# EAGLE board PWR1 (EAGLE 4.16)
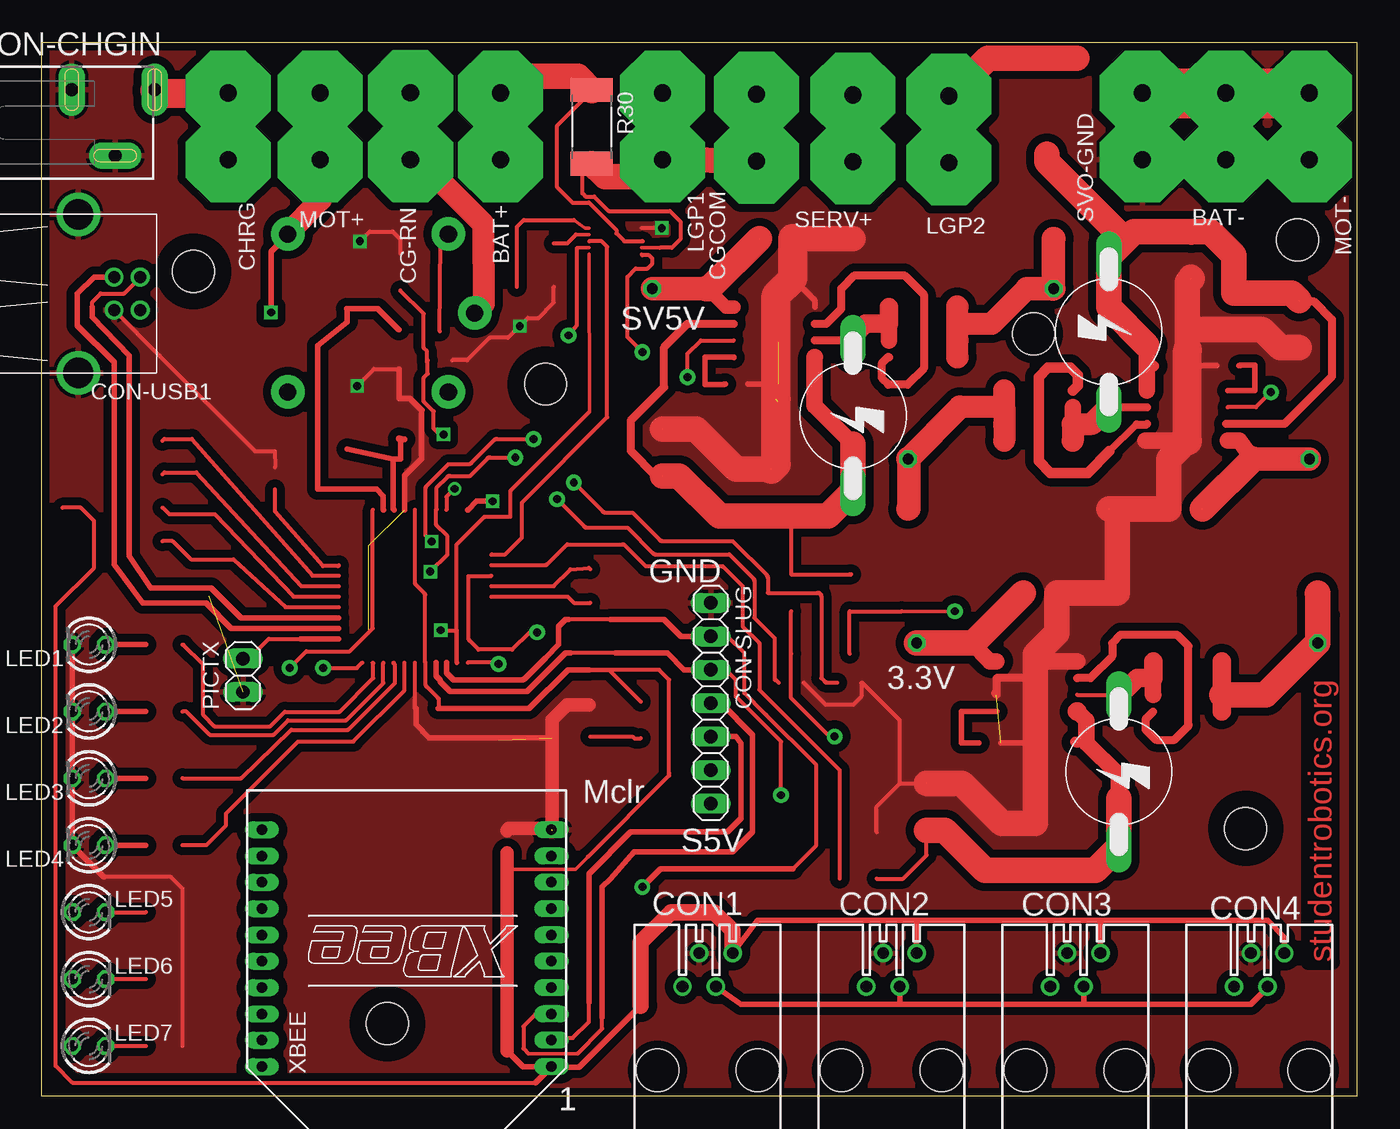
[diagram p0: board, top side]
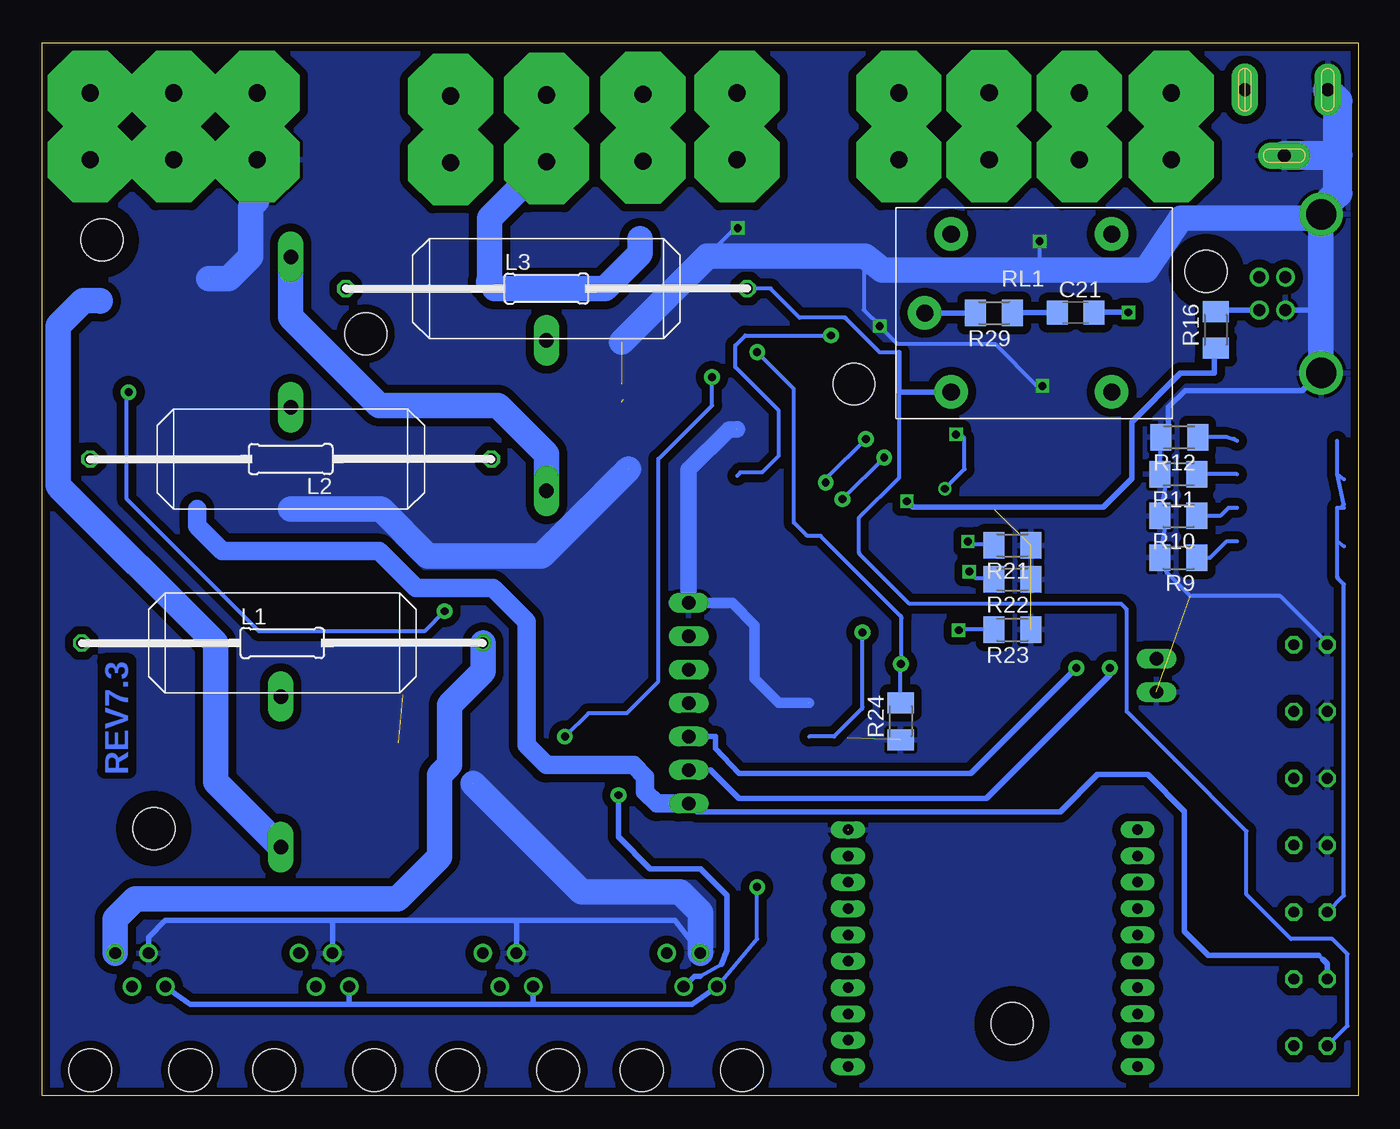
[diagram p1: board, bottom side, seen from below]

Size 100 x 80 mm. Coordinates in mm from the lower left corner, seen from the top.
Outline: 0,0 100,0 100,80 0,80 0,0
Copper layers (1*16): Top 0.035mm / dielectric 1.5mm / Bottom 0.035mm
Design rules "default": minimum track width 0.2mm, minimum drill 0.5mm, track to track 0.2mm, track to pad 0.2mm, pad to pad 0.2mm, via to via 0.2mm, smd to smd 0mil, copper to edge 0.2mm, drill to drill 0.3mm, minimum pad ring 10mil, minimum via ring 8mil, stop-mask expansion 4mil, vias tented up to drill 0mil, thermal gap 10mil
Holes 3.2 mm at 91.52,20.32 26.32,5.51 38.33,54.08 75.42,57.89 95.47,65.03 11.57,62.63
tRestrict: area 36.4,52.1 to 40.3,56; area 89.6,18.4 to 93.5,22.3; area 93.6,63.1 to 97.4,66.9; area 24.4,3.5 to 28.3,7.4; area 9.6,60.7 to 13.5,64.6
bRestrict: area 36.4,52.1 to 40.3,56; area 93.6,63.1 to 97.4,66.9; area 24.4,3.5 to 28.2,7.4; area 89.6,18.4 to 93.5,22.3; area 9.6,60.7 to 13.5,64.6

## Footprints (pad centres in the part's own frame; a part is rotated, then mirrored left to right if it is on the bottom)
SPADE = drill 1.3 pad 6.452 octagon: P$1 -5.08,-3.175; P$2 0,-3.175
C1206 = smd 1.6 x 1.8: 1 -1.4,0; 2 1.4,0
RJ11-4P4C = drill 0.889 round: 1 1.905,8.89; 2 0.635,6.35; 3 -0.635,8.89; 4 -1.905,6.35 | hole 3.251: -3.81,0; 3.81,0
SCD-014-A = drill 1 pad 2 long: 1 -2.5,13.8; 2 -2.5,7.5; 3 2.5,10.8
1X07 = drill 1.016 long: 1 -7.62,0; 2 -5.08,0; 3 -2.54,0; 4 0,0; 5 2.54,0; 6 5.08,0; 7 7.62,0
USB-B-H = drill 0.914 round: D+ 0,1.25; D- 1.981,1.25; GND 0,-1.25; VBUS 1.981,-1.25 | drill 2.286 round: GND@1 -2.718,6.02; GND@2 -2.718,-6.02
30MMRES = drill 0.813 octagon: 1 -15.24,0; 2 15.24,0
LED3MM = drill 0.813 octagon: A -1.27,0; K 1.27,0
1X02 = drill 1.016 long: 1 -1.27,0; 2 1.27,0
M1206 = smd 1.6 x 2: 1 -1.4,0; 2 1.4,0
PWR-RES = drill 1.1 pad 1.93 long: P$1 -5.715,0; P$2 5.715,0
R2512 = smd 1.8 x 3.2: 1 -2.8,0; 2 2.8,0
RELAY5PIN = drill 1.3 pad 2.54 round: C -2,0; COIL1 0,6; COIL2 0,-6; NC 12.2,-6; NO 12.2,6
XBEE = drill 0.8 pad 1.27 long: 1 -11,9; 2 -11,7; 3 -11,5; 4 -11,3; 5 -11,1; 6 -11,-1; 7 -11,-3; 8 -11,-5; 9 -11,-7; 10 -11,-9; 11 11,-9; 12 11,-7; 13 11,-5; 14 11,-3; 15 11,-1; 16 11,1; 17 11,3; 18 11,5; 19 11,7; 20 11,9

## Placement (x,y rotation side)
BAT+  6.3X0.8-SPADE  [SPADE]  31.74,76.19 90 top
BAT-  6.3X0.8-SPADE  [SPADE]  86.83,76.19 90 top
C21  [C1206]  21.49,59.51 0 bottom
CG-RN  6.3X0.8-SPADE  [SPADE]  24.88,76.2 90 top
CGCOM  6.3X0.8-SPADE  [SPADE]  51.17,76.09 90 top
CHRG  6.3X0.8-SPADE  [SPADE]  11.04,76.19 90 top
CON1  MODULE_CON  [RJ11-4P4C]  50.63,1.96 0 top
CON2  MODULE_CON  [RJ11-4P4C]  64.61,1.96 0 top
CON3  MODULE_CON  [RJ11-4P4C]  78.58,1.96 0 top
CON4  MODULE_CON  [RJ11-4P4C]  92.55,1.96 0 top
CON-CHGIN  charger in  [SCD-014-A]  -5.16,73.94 270 top
CON-SLUG  [1X07]  50.89,29.84 270 top
CON-USB1  USB-B-H  [USB-B-H]  5.55,60.96 0 top
L1  L-30MM  [30MMRES]  81.75,34.41 0 bottom
L2  L-30MM  [30MMRES]  81.11,48.38 180 bottom
L3  L-30MM  [30MMRES]  61.68,61.34 0 bottom
LED1  [LED3MM]  3.64,34.29 180 top
LED2  [LED3MM]  3.64,29.2 180 top
LED3  [LED3MM]  3.64,24.12 180 top
LED4  [LED3MM]  3.64,19.04 180 top
LED5  [LED3MM]  3.64,13.97 0 top
LED6  [LED3MM]  3.64,8.89 0 top
LED7  [LED3MM]  3.64,3.8 0 top
LGP1  4.8X0.8-SPADE  [SPADE]  44.04,76.19 90 top
LGP2  4.8X0.8-SPADE  [SPADE]  65.8,75.97 90 top
MOT+  6.3X0.8-SPADE  [SPADE]  18.02,76.19 90 top
MOT-  6.3X0.8-SPADE  [SPADE]  93.18,76.19 90 top
PICTX  [1X02]  15.35,31.96 90 top
R9  220k  [M1206]  13.68,40.89 180 bottom
R10  220k  [M1206]  13.68,44.06 180 bottom
R11  220k  [M1206]  13.68,47.24 180 bottom
R12  220k  [M1206]  13.62,50.04 180 bottom
R16  4.7k  [M1206]  10.85,58.2 90 bottom
R21  220k  [M1206]  26.29,41.83 180 bottom
R22  220k  [M1206]  26.29,39.25 180 bottom
R23  220k  [M1206]  26.29,35.42 180 bottom
R24  220k  [M1206]  34.78,28.46 90 bottom
R25  RSENSE  [PWR-RES]  81.88,24.63 270 top
R26  RSENSE  [PWR-RES]  81.11,58.03 90 top
R27  RSENSE  [PWR-RES]  61.68,51.68 270 top
R29  [M1206]  27.69,59.48 180 bottom
R30  0.04R  [R2512]  41.83,73.63 270 top
RL1  SRM-1C-SL-5VDCRELAY  [RELAY5PIN]  30.94,59.48 0 bottom
SERV+  4.8X0.8-SPADE  [SPADE]  58.51,76.05 90 top
SVO-GND  4.8X0.8-SPADE  [SPADE]  80.48,76.19 90 top
XBEE  XBEE  [XBEE]  27.78,11.23 180 top

## Library data of the parts
BAT+ BAT- CG-RN CGCOM CHRG L1-L3 LGP1 LGP2 MOT+ MOT- R25-R27 RL1 SERV+ SVO-GND XBEE = ecssr-Pwr
C21 R9-R12 R16 R21-R24 R29 R30 = rcl
CON1-CON4 = ecssr
CON-CHGIN = con-shiua-chyuan
CON-SLUG PICTX = pinhead
CON-USB1 = con-usb-2
LED1-LED7 = led

## Nets
5VSERVO: L3.2 LED7.A RL1.COIL2 SERV+.P$1
GND: BAT-.P$2 CON1.3 CON2.3 CON3.3 CON4.3 CON-CHGIN.2 CON-CHGIN.3 CON-SLUG.1 CON-USB1.GND CON-USB1.GND@1 CON-USB1.GND@2 LED1.K LED2.K LED3.K LED4.K MOT-.P$2 PICTX.1 R9.2 R10.2 R11.2 R12.2 R21.1 R22.1 R23.1 R24.1 SVO-GND.P$1 XBEE.10
L2: L3.1
N$1: LED1.A
N$2: CGCOM.P$2 LGP1.P$1 R30.2
N$3: RL1.COIL1
N$4: LED2.A
N$5: R25.P$1
N$7: C21.1 R29.1
N$11: R27.P$1
N$13: R26.P$1
N$14: LGP2.P$1
N$16: LED3.A
N$17: C21.2 MOT+.P$2 RL1.NO
N$21: LED4.A
N$22: L1.1
N$23: L2.1
N$25: R9.1
N$26: R10.1
N$27: R11.1
N$28: R12.1
N$30: LED5.K
N$31: LED6.K
N$37: LED7.K
N$38: R22.2
N$39: BAT+.P$2 R30.1
N$43: R21.2
N$49: CON-USB1.VBUS R16.2
N$51: CON-USB1.D-
N$52: CON-USB1.D+
N$54: CHRG.P$2 CON-CHGIN.1
N$61: R24.2
N$62: R23.2
N$63: R16.1
PICTXS: PICTX.2
RX2PIC: CON-SLUG.5 XBEE.2
SCL: CON1.4 CON2.4 CON3.4 CON4.4 CON-SLUG.2
SDA: CON1.2 CON2.2 CON3.2 CON4.2 CON-SLUG.3
SLUG-BOOT: CON-SLUG.6
TX2SLUG: CON-SLUG.4 XBEE.3
VLOGICRAW: R25.P$2 R26.P$2 R27.P$2
VRAW: CG-RN.P$2 R29.2 RL1.C
VREG3.3: CON1.1 CON2.1 CON3.1 CON4.1 L1.2 LED5.A XBEE.1
VREGSLUG5: CON-SLUG.7 L2.2 LED6.A

## Tracks (layer width: path | path; a pad name or v marks a point on that pad's centre or on a via)
5VSERVO  (1 unrouted)
  Top 1.016: 50.51,61.34 50.51,61.46 52.03,59.94 52.64,59.94
  Top 1.778: 50.37,61.34 50.51,61.34 | L3.2 50.37,61.34 | 50.37,61.34 50.37,61.33
  Top 1.93: 50.51,61.34 50.76,61.34 54.57,65.15
  Bottom 0.3: 1.99,11.93 5.14,11.93 8.51,15.3 8.51,20.1 13.93,25.52
  Bottom 0.305: 39.02,59.13 38.96,59.13 | 39.02,59.13 42.45,59.12 44.67,61.34 46.42,61.34 | LED7.A 0.85,5.33 0.85,10.79 1.99,11.93 | 13.93,25.52 17.61,29.2 17.61,33.02 17.61,33.01 17.61,36.87 arc-45 17.68,37.04 18.02,37.38 34.11,37.38 37.86,41.13 arc45 37.94,41.31 37.94,43.94 34.89,46.98 34.89,53.5 34.92,53.53 34.91,53.54 | 39.02,59.13 39.02,59.14 36.36,56.48 34.91,56.48 | 46.42,61.34 L3.2 | 46.42,61.34 46.42,61.38
  Bottom 0.406: 34.91,56.48 34.91,53.54 34.89,53.48 RL1.COIL2
  Bottom 1.778: 61.73,70.96 SERV+.P$1 | 65.57,61.34 65.57,61.38 66.07,61.88
  Bottom 1.93: 54.57,65.15 54.57,64 57.24,61.34 65.57,61.34 65.62,61.34 | 66.07,61.88 66.02,61.93 66.02,66.68 61.73,70.96
ADCI
  Top 0.3: 42.59,64.94 41.65,64.94
  Top 0.305: 42.59,64.94 43.02,64.51 43.02,51.56 36.54,45.08 36.54,42.41 35.27,41.14 34.25,41.14 34.24,41.13 34.21,41.13
ADCV
  Top 0.305: 60.66,16.5 60.66,16.63 60.67,16.63 60.66,16.63 60.66,20.06 60.66,20.18 arc-45 60.67,20.19 60.67,24.76 54.57,30.86 54.57,34.41 53.3,35.68 53.3,38.73 51.85,40.18 arc45 51.67,40.25 45.94,40.25 44.36,41.83 arc45 44.18,41.91 39.97,41.91 38.47,40.4 arc-45 38.29,40.33 34.21,40.33
GND  (via drill 0.6)  (16 unrouted)
  Top 0.305: 4.79,16.63 9.87,16.63 10.76,15.74 10.76,13.97 10.76,13.96 10.76,8.89 | 10.76,8.89 | 10.76,3.8 10.76,3.81 10.76,8.89 | 17.78,47.77 17.77,48.99 16.27,48.99 8.98,56.26 5.55,59.69 CON-USB1.GND | 63.46,20.06 63.46,21.97 65.24,23.74 | 67.27,23.74 67.27,23.87 67.14,23.74 65.24,23.74 | 57.94,31.41 59.63,29.71 61.68,29.71 62.32,30.35 62.32,31.36 62.34,31.36 62.38,31.41 65.24,28.55 65.24,23.74 | 41.62,29.71 41.74,29.84 | 28.48,29.44 28.45,29.44 arc-45 28.43,29.45 arc-45 28.41,29.5 28.41,32.93 | 45.62,65.94 45.72,65.94 45.73,65.93 45.74,65.94 v47.16,65.94 | 38.95,61.46 38.95,60.27 37.79,59.11 36.99,59.11 v36.37,58.49 v36.37,58.5 | 27.2,55.23 25.3,55.23 v24.01,53.94 | 31.24,55.9 32.38,55.9 34.08,57.6 35.47,57.6 v36.37,58.5 | v36.37,58.5 36.39,58.52 | 27.29,64 27.29,65.11 26.72,65.68 24.97,65.68 v24.22,64.93
  Top 0.406: 58.79,59.94 58.79,60.42 57.11,62.1 | 38.7,20.31 XBEE.10 | LED4.K | LED4.K LED3.K | 4.79,16.63 4.78,16.63 LED4.K | LED3.K 2.38,24.14 2.38,24.15 | LED3.K LED2.K | LED2.K 2.38,29.24 2.38,29.25 | 2.38,34.34 LED1.K | LED2.K 2.38,34.34 | 2.38,34.34 2.38,34.32 2.4,34.32 2.4,34.33 | 28.48,29.44 28.48,28.21 29.5,27.19 38.82,27.19 | 53.7,54.07 55.97,54.07 55.97,52.7 | 87.08,55.51 87.11,55.51 87.11,55.5 89.31,55.5 | 72.93,26.83 76.16,26.83 76.16,25.77 | 2.4,34.33 2.4,34.4 2.38,34.4 2.38,34.39 2.4,34.39 2.4,34.33 | 2.4,34.33 2.33,34.33 2.33,34.28 | 27.2,55.23 27.2,53.01 27.22,52.99 27.2,52.97 28.03,52.97 28.91,52.09 28.93,52.09 | 27.61,44.53 27.61,47.12 28.91,48.42 28.91,52.07 28.93,52.09 | 28.93,52.09 28.94,52.1
  Top 0.61: 72.58,30.47 72.58,30.5 72.48,30.6 72.58,30.7 72.58,31.74 75.53,31.74
  Top 1.016: 41.62,29.71 39.97,29.71 38.82,28.57 38.82,27.19 38.82,20.19 38.81,20.17 | 35.39,20.15 35.39,20.19 35.52,20.31 38.7,20.31
  Top 1.27: 83.91,49.78 84.01,49.78 87.08,49.78 | 55.84,52.95 55.71,52.95 | 75.53,33.02 78.73,33.02
  Top 1.93: 87.08,49.78 85.69,48.38 85.69,44.57 81.75,44.57 | 81.75,44.57 81.11,44.57 | 87.47,62.1 87.34,62.23 87.34,62.1 87.08,61.84 87.08,58.23 | 87.08,56.64 87.08,58.23 | 57.11,65.15 61.68,65.15 | 47.21,50.67 49.75,50.67 52.79,47.62 55.46,47.62 | 67.27,23.74 69.94,23.74 72.99,20.7 75.53,20.7 75.53,31.74 75.53,33.02 75.53,33.52 77.18,35.17 77.18,38.22 81.75,38.22 81.75,44.57 | 95.59,56.85 94.15,56.85 92.77,58.23 87.08,58.23
  Top 2.184: 87.08,49.78 87.08,55.51 87.08,56.64 | 57.11,65.15 57.11,62.1 55.84,60.83 55.84,52.95 55.84,48 55.46,47.62
  Top 3.81: MOT-.P$2 BAT-.P$2 83.66,76.19 SVO-GND.P$1
  Bottom 0.305: 14.57,50.29 14.57,50.28 R12.2 R11.2 14.57,46.98 14.44,46.86 14.57,46.73 R10.2 14.57,43.81 R9.2 14.57,39.75 12.79,37.97 5.93,37.97 2.38,34.41 | 49.49,63.8 47.35,65.94 v47.16,65.94 | 37.6,63.8 37.6,63.7 37.57,63.67 37.57,59.71 36.37,58.51 v36.37,58.49 36.37,58.46 35.05,57.14 27.63,57.14 24.43,53.94 v24.01,53.94 | 24.22,62.74 v24.22,64.93
  Bottom 0.406: CON4.3 91.91,12.06 90.64,13.33 77.94,13.33 | 63.97,13.33 51.91,13.33 CON1.3 | 63.97,13.33 77.94,13.33 | 63.97,13.33 CON2.3 | 77.94,13.33 CON3.3 | 2.88,54.99 4.28,53.59 13.17,53.59 14.44,52.32 14.44,50.29 R12.2 | CON-USB1.GND 5.53,59.69 2.88,59.69 | LED1.K 2.38,34.33 2.38,34.34 2.38,34.41
  Bottom 0.813: 41.74,29.84 44.01,29.84 45.87,31.7 45.87,35.76 47.57,37.46 50.84,37.46 50.87,37.43 CON-SLUG.1
  Bottom 1.27: CON-SLUG.1 50.89,47.58 47.83,50.64 47.22,50.64 47.21,50.65 47.21,50.67
  Bottom 1.93: CON-USB1.GND@2 2.88,54.99 2.88,59.69 2.88,66.67 | 2.88,66.67 2.88,66.92 CON-USB1.GND@1 2.83,66.72 2.88,66.67 | SVO-GND.P$1 83.66,68.07 84.16,67.56 84.16,63.75 85.81,62.1 87.34,62.1 | 55.46,47.62 62.06,41.02 70.7,41.02 74.26,44.57 81.11,44.57 | 2.88,66.67 12.89,66.7 13.51,66.7 16.17,62.74 24.22,62.74 36.15,62.75 37.48,63.8 37.6,63.8 49.49,63.8 49.49,63.75 55.97,57.27 | 67.27,23.74 59.02,15.49 51.52,15.49 50,13.97 CON1.3
  Bottom 2.184: 2.88,66.92 2.88,67.27 1.57,68.58 1.57,71.48 | CON-CHGIN.2 2.34,76.41 2.37,76.38 1.57,75.58 1.57,71.48 | 1.57,71.48 1.62,71.48 1.66,71.44 CON-CHGIN.3
  pour Top (isolate 0.61): -1.71,81.53 102.48,81.58 102.48,-1.11 -1.77,-0.97
  pour Bottom (isolate 0.61): -2.2,83.18 101.49,82.64 101.49,-3.06 -2.35,-2.92
L2
  Top 1.676: 69.62,56.13 69.6,56.13 69.6,57.4 | 69.6,58.67 69.6,58.68 | 69.6,57.4 69.62,57.4 | 69.6,57.4 69.6,58.67 | 69.6,59.94 69.6,59.97 | 69.6,59.94 69.62,59.94 | 69.6,58.67 69.62,58.67 69.64,58.67 72.22,58.67 74.89,61.34 | 69.6,58.67 69.6,59.94 | 76.87,61.34 76.87,61.38 | 76.92,65.15 76.87,65.15
  Top 1.778: 76.87,61.34 L3.1 | 74.89,61.34 76.87,61.34 | 76.87,61.34 76.87,61.28 | 76.92,65.15 76.92,61.38 76.87,61.38
N$1
  Top 0.406: LED1.A | LED1.A 7.96,34.29 | LED1.A
N$2
  Top 0.25: 45.62,64.44 47.02,64.44 47.06,64.44
  Top 0.305: 47.02,64.44 47.02,64.43 47.92,64.43 48.57,65.08 48.57,66.43 47.77,67.23 43.12,67.23 42.02,68.33 41.37,68.33 41.12,68.58 41.12,70.08 41.87,70.83 R30.2
  Top 1.93: CGCOM.P$2 54.25,71.06 LGP1.P$1 47.34,71.11 46.06,69.83 42.83,69.83 R30.2
N$3
  Top 0.305: RL1.COIL1 30.35,64.9 30.29,58.1
N$4
  Top 0.406: LED2.A 4.84,29.2 | 4.84,29.2 7.96,29.2 | 4.84,29.2 4.84,29.19
N$5
  Top 0.305: 78.73,30.47 81.88,30.47
  Top 0.406: 81.88,30.34 R25.P$1 | 81.88,30.47 81.88,30.34 | 81.88,30.34 81.87,30.33
  Top 1.27: 84.48,31.74 84.47,31.73 84.47,30.49 84.48,30.47
  Top 1.422: 84.48,31.74 84.48,31.73 84.47,31.73 | 84.48,31.74 84.48,33.02 | 84.48,31.74 83.27,31.74 R25.P$1
N$6
  Top 0.406: 71.23,26.83 69.91,26.83 69.91,29.2 72.63,29.2 | 72.63,29.2 72.58,29.2 | 72.63,29.2
N$7
  Bottom 0.406: 26.27,59.51 26.27,59.48 R29.1 | C21.1 26.27,59.51 | 26.27,59.51 26.27,59.53
N$8
  Top 0.406: 51.9,54.07 51.9,54.09 | 51.9,54.07 52,54.07 | 51.9,54.07 51.9,54.06 50.44,54.06 50.44,56.13 52.63,56.13 | 52.63,56.13 52.64,56.13 | 52.63,56.13 52.63,56.11
N$10
  Top 0.61: 78.73,31.74 79.72,31.74 81.37,33.4 81.37,34.41 82,35.05 arc-45 82.01,35.03 86.2,35.03 arc-45 86.38,34.96 87.17,34.17 87.17,28.21 arc-45 87.1,28.04 86.11,27.05 84.8,27.05 arc-45 84.62,27.12 83.92,27.82 83.92,28.54 arc-45 83.99,28.71 84.48,29.2
N$11
  Top 0.61: R27.P$1 58.8,57.41 58.79,57.4
  Top 1.27: 64.42,58.67 64.4,58.65 64.42,58.63 64.42,57.4
  Top 1.422: 64.42,59.94 64.41,59.94 64.4,59.93 64.42,59.91 64.42,58.67 64.41,58.67 62.63,58.67 61.68,57.72 R27.P$1
N$12
  Top 0.406: 90.16,53.59 92.19,53.59 92.19,55.51 91.09,55.51 | 91.09,55.51 91.09,55.5 91.01,55.5 | 91.09,55.51 91.09,55.52
N$13
  Top 0.61: 84.01,52.32 R26.P$1
  Top 1.27: 78.38,52.32 78.37,52.31 78.37,51.06 78.38,51.05
  Top 1.676: 78.38,49.78 78.38,51.02 78.37,51.03 78.38,51.04 78.38,51.05 79.85,51.05 R26.P$1
N$14
  Top 1.93: 78.7,78.83 74.14,78.83 71.92,78.83 68.97,75.88 LGP2.P$1 68.97,70.83
N$15
  Top 0.55: 81.17,48.98 83.21,51.02
  Top 0.61: 84.01,51.05 83.99,51.03 83.99,51.02 83.21,51.02
  Top 0.813: 78.38,53.59 78.75,53.96 78.75,54.78 78.21,55.32 76.48,55.32 75.79,54.63 75.79,48.22 76.67,47.34 79.52,47.34 81.16,48.98 81.17,48.98
N$16
  Top 0.406: LED3.A 4.9,24.12 | 4.9,24.12 7.96,24.12 | 4.9,24.12 4.9,24.11
N$17  (via drill 0.6)
  Top 0.406: RL1.NO 18.74,65.46 18.77,65.43 17.47,64.13 v17.47,59.53
  Top 1.676: MOT+.P$2 21.25,68.09 RL1.NO
  Bottom 0.406: C21.2 20.07,59.53 v17.47,59.53
N$20
  Top 0.61: 58.79,58.67 59.65,58.67 60.8,59.81 60.8,61.34 61.81,62.35 65.59,62.35 67.06,60.88 67.06,55.27 65.82,54.03 64.37,54.03 63.89,54.51 63.89,55.68 64.37,56.16 64.4,56.13 64.42,56.13
N$21
  Top 0.406: LED4.A 4.88,19.04 | 4.88,19.04 7.96,19.04 | 4.88,19.04
N$22
  Top 0.406: 89.75,30.48 89.75,30.43 89.7,30.47 89.68,30.47
  Top 1.422: 89.69,31.75 89.68,31.74 | 89.68,29.2 89.69,29.21 89.69,30.48 89.69,31.75 | 89.69,33 89.68,33 89.68,33.02 | 89.69,31.75 89.69,33 | 89.69,33 89.7,33
  Top 1.93: 89.69,30.48 89.75,30.48 93.06,30.48 93.06,30.52 96.97,34.43 L1.1 96.99,38.16 96.97,38.18 96.99,38.2 96.99,38.22
N$23
  Top 1.676: 73.18,49.78 73.18,50.96 73.16,50.98 73.18,51 73.18,51.05 73.18,52.32 | 73.18,52.32 73.18,52.34 73.15,52.37 69.84,52.37 69.81,52.34 69.81,52.32 | 73.18,53.59 73.18,53.58 73.16,53.56 73.18,53.54 73.18,52.32
  Top 1.778: 69.81,52.32 65.92,48.43 65.87,48.43 L2.1 65.92,48.34 65.92,44.62 65.88,44.57
N$25  (1 unrouted)
  Top 0.305: 22.61,37.13 18.58,37.13 14.63,40.76 11.39,40.76 10,42.16 9.23,42.16
  Bottom 0.305: R9.1 11.27,40.89 10,42.16 9.23,42.16
N$26  (1 unrouted)
  Top 0.305: 22.61,37.93 19.18,37.93 13.21,44.19 9.74,44.19 9.23,44.7
  Bottom 0.305: R10.1 10.5,44.06 9.87,44.7 9.23,44.7
N$27  (1 unrouted)
  Top 0.305: 22.61,38.73 19.77,38.73 11.8,47.37 9.36,47.37 9.23,47.24
  Bottom 0.305: 9.23,47.24 R11.1
N$28  (1 unrouted)
  Top 0.305: 22.61,39.53 20.62,39.53 11.45,49.91 9.36,49.91 9.23,49.78
  Bottom 0.305: 9.23,49.78 9.46,49.92 9.96,50.04 R12.1
N$29  (via drill 0.6 pad 1.2)
  Top 0.305: 61.43,33.61 61.43,36.82 65.36,36.82 v69.43,36.83 | 90.13,52.32 90.16,52.32 92.29,52.32 v93.43,53.46
  Bottom 0.305: v93.43,53.46 93.56,53.34 93.56,45.33 83.53,35.3 70.95,35.3 v69.43,36.83
N$30
  Top 0.305: 7.96,13.97 LED5.K
N$31
  Top 0.305: LED6.K 7.96,8.89
N$32  (via drill 0.6 pad 1.2)  (1 unrouted)
  Top 0.305: 45.55,27.17 45.05,27.17 44.92,27.3 41.74,27.3 | 34.21,39.53 arc-45 34.12,39.49 32.47,39.49 32.47,34.77 arc45 32.55,34.59 33.24,33.9 35.8,33.9 37.06,35.17 arc-45 37.24,35.24 37.65,35.24 arc-45 v37.68,35.23
  Bottom 0.305: 41.74,27.3 39.84,27.3 37.75,29.39 arc-45 37.68,29.56 v37.68,35.23 | v37.68,35.23 | v37.68,35.23 arc45 v37.68,35.23
N$36  (via drill 0.6 pad 1.2)
  Top 0.305: 56.98,36.82 56.98,33.61 56.98,30.22 59.91,27.3 v60.29,27.3 | 52.64,57.4 50.13,57.4 49.11,56.38 v49.11,54.61
  Bottom 0.305: v49.11,54.61 49.11,52.47 53.17,48.4 53.17,31.49 55.59,29.08 58.51,29.08 v60.29,27.3
N$37
  Top 0.305: LED7.K 7.96,3.8
N$38  (via drill 0.6, 0.6 pad 1.2)
  Top 0.305: 56.03,31.41 55.9,31.54 arc45 55.72,31.62 55.72,34.79 54.19,36.32 54.19,39.13 arc45 54.12,39.31 52.29,41.14 46.68,41.14 arc-45 46.5,41.22 44.54,43.18 41.47,43.18 arc-45 41.29,43.25 v39.2,45.33 | v36.03,48.51 34.1,48.51 arc45 33.92,48.44 32.6,47.11 31.05,47.11 arc45 30.88,47.04 30.06,46.22 30.06,44.57 30.02,44.54 | 30.02,44.54 arc-45 30.01,44.53 | 30.02,44.54 30.02,43.38 30.87,42.53 30.87,41.13 v29.57,39.83
  Bottom 0.305: v36.03,48.51 v39.2,45.33 | R22.2 27.67,39.27 27.67,39.33 29.07,39.33 v29.57,39.83
N$39
  Top 0.305: 45.62,64.94 45.71,64.94 45.72,64.93 44.32,64.93 43.72,65.53 43.72,65.78 41.62,67.88 40.36,67.88 40.37,67.88 39.22,69.03 39.22,73.73 41.87,76.38
  Top 1.93: BAT+.P$2 36.09,77.46 40.78,77.46 R30.1 | 41.87,76.38 R30.1 | R30.1
N$40
  Top 0.305: 17.78,46.07 17.78,44.4 21.42,40.25 22.57,40.25 22.61,40.3 22.61,40.33
N$42  (via drill 0.6)
  Top 0.305: 30.81,44.53 30.81,45.52 v31.42,46.13 | v30.57,50.26 30.29,50.26 29.83,50.72 29.83,52 29.07,52.76 29.07,54.57 29.37,54.87 29.36,54.88 29.36,55.88 29.34,55.9 | 29.34,55.9 29.37,55.87 | 27.29,61.2 29.07,59.42 29.07,56.83 29.32,56.58 29.32,55.88 | 29.32,55.88 29.32,55.78 | 29.34,55.9 29.32,55.88
  Bottom 0.305: v31.42,46.13 29.93,47.62 29.94,47.63 29.94,49.98 30.22,50.26 v30.57,50.26
N$43  (via drill 0.6, 0.6 pad 1.2)
  Top 0.305: 60.48,31.41 59.71,31.41 arc-45 59.53,31.48 59.27,31.74 59.27,37.97 arc90 59.02,38.22 55.21,38.22 55.21,39.39 arc45 55.13,39.57 52.54,42.16 47.18,42.16 arc-45 47,42.23 44.92,44.32 42.87,44.32 arc-45 42.69,44.39 v40.48,46.6 | v37.43,49.91 34.61,49.91 arc45 34.43,49.83 32.67,48.08 arc-45 32.5,48 30.95,48 29.28,46.34 arc45 29.21,46.16 29.21,44.53 29.21,42.59 v29.67,42.13
  Bottom 0.305: v40.48,46.6 40.48,46.75 arc45 40.4,46.93 v37.43,49.91 | R21.2 27.67,41.85 27.67,41.88 29.42,41.88 v29.67,42.13
N$44
  Top 0.305: 26.01,32.93 26.01,32.9 26,32.89 26,31.38 | 26,31.38 26,31.36 | 10.76,29.2 11.04,29.2 12.82,27.43 17.67,27.43 18.77,28.53 23.17,28.53 26.02,31.38 26,31.38
N$47
  Top 0.305: 34.21,37.93 40,37.93 40.48,37.46 41.74,37.46
N$48
  Top 0.305: 34.21,38.73 38.95,38.73 40.22,40 41.62,40.13 41.74,40
N$49
  Bottom 0.406: 7.52,59.69 7.48,59.69 | CON-USB1.VBUS 7.52,59.69 | R16.2 10.76,59.69 7.52,59.69
N$50
  Top 0.305: 25.21,32.93 25.21,32.91 25.23,32.89 25.23,31.74 22.67,29.18 18.52,29.18 17.42,28.08 13.17,28.08 12.32,28.93 12.32,32.78 10.82,34.28 10.77,34.28 10.76,34.29
N$51
  Top 0.305: 3.9,59.94 3.9,60.32 4.53,60.96 6.31,60.96 7.53,62.17 CON-USB1.D-
  Top 0.406: 22.61,36.33 15.19,36.33 12.92,38.6 8.34,38.6 6.69,41.02 6.69,56.26 3.9,59.18 3.9,59.94
N$52
  Top 0.406: 22.61,35.53 14.46,35.53 12.54,37.46 7.71,37.46 5.55,40.38 5.55,55.75 2.76,58.54 2.76,60.96 4.03,62.23 5.55,62.23 CON-USB1.D+
N$53
  Top 0.305: 27.61,32.93 27.61,30.82 23.71,26.92 19.52,26.92 14.06,21.46 14.06,20.57 12.54,19.04 10.76,19.04
N$54
  Top 1.93: 14.34,76.19 CHRG.P$2
  Top 2.184: CON-CHGIN.1 8.64,76.36 8.81,76.19 14.34,76.19
N$56
  Top 0.25: 40.64,65.44 41.65,65.44
  Top 0.305: 40.64,65.44 39.97,64.77 38.95,64.77
N$58
  Top 0.25: 41.65,65.94 41.33,65.94 40.48,66.54
  Top 0.305: 40.48,66.54 36.66,66.54 36.16,66.03 36.16,65.53 36.15,64.77 36.15,62.36 36.16,62.35 36.15,61.46
N$61  (via drill 0.6 pad 1.2)
  Top 0.25: 45.62,63.94 45.63,63.94 45.63,63.9 45.68,63.9
  Top 0.3: 46.44,63.24 46.44,63.62 46.19,63.88 45.68,63.88
  Top 0.305: 32.41,32.93 34.67,32.93 v34.76,32.82 | v45.68,56.51 44.54,57.65 44.54,62.23 45.17,62.86 46.06,62.86 46.44,63.24 | 45.68,63.88 45.68,63.9
  Bottom 0.305: v45.68,56.51 42.96,53.79 arc45 42.89,53.61 42.89,43.56 41.95,42.61 arc-45 41.77,42.54 40.86,42.54 34.79,36.48 arc45 34.72,36.3 34.72,33.04 arc-45 34.75,33.03 v34.76,32.82 v34.76,32.83 | v34.76,32.83 34.72,32.83 | R24.2 34.78,32.83 v34.76,32.83
N$62  (via drill 0.6)
  Top 0.25: 41.67,51.99 41.65,63.94
  Top 0.305: 31.58,32.89 31.61,32.91 31.61,32.93 | 31.58,32.89 31.58,41.91 33.62,43.94 arc-45 33.8,44.01 35.66,44.01 35.66,45.88 arc-45 35.73,46.05 41.67,51.99 | 31.58,32.89 31.58,35.38 v30.37,35.38
  Bottom 0.305: R23.2 30.37,35.43 v30.37,35.38
N$63  (via drill 0.6)
  Top 0.406: 32.41,44.53 32.43,44.53 33.08,45.18 v34.31,45.18
  Bottom 0.406: R16.1 10.95,56.8 10.95,54.9 13.52,54.9 17.23,51.19 17.23,46.9 19.4,44.73 33.86,44.73 v34.31,45.18
N$67
  Top 0.406: 26.81,44.53 26.77,44.57 26.76,44.57 26.76,48.38 | 26.76,48.38 23.25,49.14 | 26.76,48.38 27.3,48.38 27.3,49.81 27.17,49.94 27.2,49.97 27.62,49.89 27.61,49.88
N$68
  Top 0.406: 26.01,44.53 26,44.54 26,45.59 25.49,46.1 24.22,46.1 21.01,46.09 21.01,57.02 23.25,58.79 23.25,59.81 23.23,59.83 25.56,59.83 27.16,58.23 27.2,58.23
N$69
  Top 0.305: 10.76,24.12 15.21,24.12 19.02,27.81 23.33,27.81 26.89,31.36 26.89,32.76 26.76,32.89 26.8,32.93 26.81,32.93
PICTXS
  Top 0.305: 19.71,34.73 17.3,34.73 15.8,33.23 PICTX.2
  Top 0.406: 19.71,34.73 22.61,34.73
RX2PIC  (via drill 0.6 pad 1.2)
  Top 0.25: 38.71,4.16 38.71,4.17 | 38.71,4.16 XBEE.2 38.94,4.4 | 38.71,4.16 38.71,4.1
  Top 0.3: 41.62,7.11 41.62,5.63 40.39,4.4 38.94,4.4
  Top 0.305: 24.41,32.93 23.99,32.51 v21.42,32.51
  Top 0.406: CON-SLUG.5 52.79,27.3 53.17,26.79 53.17,21.08 52.16,20.06 44.79,20.06 41.62,16.89 41.62,7.11 | 38.71,4.17 38.7,4.19
  Bottom 0.4: v21.42,32.51 29.43,24.51 47.08,24.51 48.86,26.41 48.86,27.3 CON-SLUG.5
SCL  (via drill 0.6 pad 1.2)
  Top 0.305: 43.27,36.19 40.09,36.19 | 54.95,29.08 53.43,30.6 53.43,33.65 52.16,34.92 CON-SLUG.2 | 54.95,29.08 55.08,28.95 | 57.11,17.27 58.89,19.04 58.89,25.14 54.95,29.08
  Top 0.406: 30.81,32.93 30.81,32.14 31.33,31.62 36.55,31.62 arc45 36.73,31.69 38.31,33.27 arc45 38.31,33.27 38.32,33.27 39.33,34.29 39.33,35.68 39.84,36.19 40.09,36.19 | 43.27,36.19 47.33,36.19 48.6,34.92 CON-SLUG.2 | v45.68,15.87 47.08,17.27 57.11,17.27
  Bottom 0.305: CON1.4 45.68,11.93 v45.68,15.87
  Bottom 0.406: CON1.4 50.63,6.98 62.7,6.98 | 62.7,6.98 76.67,6.98 | 76.67,6.98 88.73,6.98 CON4.4 | 76.67,6.98 CON3.4 | 62.7,6.98 CON2.4
SDA  (via drill 0.6 pad 1.2)
  Top 0.305: 43.65,33.65 40.22,33.65 | CON-SLUG.3 52.03,32.38 52.79,31.62 52.79,30.35 56.22,26.92 v56.22,22.86
  Top 0.406: CON4.2 93.18,8.25 91.91,6.98 79.21,6.98 | 65.24,6.98 53.17,6.98 CON1.2 | 65.24,6.98 79.21,6.98 | 65.24,6.98 CON2.2 | 79.21,6.98 CON3.2 | 30.01,32.93 30.01,31.92 30.31,31.62 30.31,31.49 31.08,30.73 36.92,30.73 39.21,33.02 | 39.21,33.02 39.84,33.65 40.22,33.65 | 43.65,33.65 47.59,33.65 48.86,32.38 CON-SLUG.3 | 39.21,33.02 39.2,33.02
  Bottom 0.305: 48.38,9.99 50.03,9.1
  Bottom 0.406: v56.22,22.86 56.22,19.68 53.81,17.27 50,17.27 47.97,15.24 47.97,11.04 48.38,9.99 | 50.03,9.1 50.46,9.1 CON1.2
SLUG-BOOT  (via drill 0.6 pad 1.2)
  Top 0.305: 25.21,44.53 25.21,35.53 23.46,33.78 20.15,33.78 v18.88,32.51
  Bottom 0.305: 18.88,32 v18.88,32.51 | 49.24,24.76 CON-SLUG.6
  Bottom 0.4: 18.88,32 28.28,22.6 47.08,22.6 49.24,24.76
TX2SLUG
  Top 0.25: 37.03,3.22 40.74,3.22 | 38.8,6.21 38.83,6.21 | 38.8,6.21 XBEE.3 | 38.82,6.22 38.83,6.23 | 38.82,6.22 | 38.8,6.21 38.81,6.21 38.82,6.22
  Top 0.3: 42.63,5.96 42.63,5.11 40.74,3.22 | 37.03,3.22 36.64,3.61 36.64,5.29 37.56,6.21 38.8,6.21
  Top 0.305: 38.82,6.22 38.7,6.09
  Top 0.406: CON-SLUG.4 51.65,29.84 54.06,27.43 54.06,20.06 52.54,18.54 45.05,18.54 43.27,16.5 42.63,15.87 42.63,5.96
VLOGICRAW  (via drill 0.6 pad 1.2)  (2 unrouted)
  Top 0.25: 40.73,64.44 41.65,64.44
  Top 0.305: 40.73,64.44 40.71,58.55 v40.08,57.78 | 61.43,39.62 61.56,39.62 | 61.43,39.62 | 56.99,39.62 56.98,39.62 | 56.99,39.62 61.43,39.62 | 56.99,39.62 56.98,39.62 56.98,44.06 | 63.46,16.5 65.49,16.5 67.27,18.28 67.27,20.19 67.27,20.31
  Top 0.61: 90,51.05 90.16,51.05 94.45,51.05 98.07,54.67 98.07,58.98 96.67,60.38 95.67,60.38 95.62,60.43 95.6,60.41 95.59,60.41 | 47.21,47.11 46.7,47.11 44.79,49.02 44.79,51.3 47.33,53.84 47.33,56.89 49.11,58.67 52.64,58.67
  Top 0.813: 78.72,26.88 78.57,26.88 | 78.72,26.88 78.74,26.86 | 79.42,26.83 79.37,26.88 78.72,26.88 | 84.01,55.58 84.07,55.58 84.2,55.45 84.55,55.45 | 58.76,52.94 58.77,52.93 | 58.76,52.95 58.76,52.94 | 58.59,54.06 58.59,53.11 58.76,52.94
  Top 1.27: 84.01,57.02 84.01,55.58 84.01,53.59 | 58.79,56.13 58.76,56.13 58.76,52.95 58.76,52.44 61.67,49.53 61.68,49.53 | 78.73,29.2 79.42,28.51 79.42,26.83 81.87,24.38 81.87,22.61 81.88,22.6
  Top 1.422: 78.73,29.2 78.7,29.2
  Top 1.93: 82.38,65.02 83.02,65.65 87.34,65.65 87.35,65.65 87.37,65.63 87.42,65.68 88.82,65.68 90.62,63.88 90.62,60.98 95.02,60.98 95.59,60.41 | 82.38,65.02 R26.P$2 81.11,59.91 84.01,57.02 | 47.21,47.11 48.48,47.11 51.52,44.06 55.46,44.06 56.98,44.06 59.78,44.06 R27.P$2 61.68,49.53 | 67.27,20.19 68.67,20.19 71.72,17.14 75.53,17.14 80.1,17.14 R25.P$2 81.88,22.6 | 76.42,71.53 76.42,70.98 82.38,65.02
  Bottom 0.305: v40.08,57.78 46.57,57.78 47.33,57.02 47.33,55.37 44.03,52.07 44.03,48.64 45.3,47.37 46.95,47.37 47.21,47.11
  Bottom 1.93: R26.P$2 81.11,59.18 74.38,52.45 65.37,52.45 61.68,48.76 R27.P$2 | R25.P$2 86.76,23.8 arc45 86.83,23.98 86.83,34.41 98.69,46.28 arc45 98.77,46.46 98.77,58.53 96.87,60.43 95.62,60.43 95.59,60.4 | 95.59,60.4 95.57,60.38 | 95.59,60.4 95.59,60.41
VRAW
  Top 1.676: RL1.C 33.64,60.18 33.63,66.23 28.08,71.78 CG-RN.P$2
  Bottom 0.406: 32.97,59.48 RL1.C R29.2
VREG3.3  (1 unrouted)
  Top 0.25: 35.39,17.17 35.46,17.23 40.6,17.23 41.55,18.18
  Top 0.3: 47.71,24.51 47.71,24.34 41.55,18.18
  Top 0.305: 41.74,32.38 41.62,32.38 | 45.55,29.97 43.14,32.38 41.74,32.38 | 41.74,32.38 46.95,32.38 47.71,31.62 47.71,24.51 | 1.61,44.7 3.01,44.7 4.03,43.68 4.03,40.13 1.1,37.21 1.1,2.28 2.38,1.01 37.55,1.01 | 28.41,44.53 28.41,39.01 arc45 28.48,38.83 29.14,38.17 arc-45 29.18,38.07 29.18,32.94 29.19,32.94 arc-45 29.21,32.93 29.21,31.29 arc45 29.28,31.11 30.16,30.23 arc-45 30.23,30.05 30.23,29.46 30.22,29.46 arc45 30.18,29.44
  Top 0.4: XBEE.1 38.8,2.21 38.8,2.17 40.87,2.17 45.55,6.85 | XBEE.1 38.76,2.21 36.61,2.21 35.39,3.42 | XBEE.1 38.86,2.15 38.69,2.15 37.55,1.01
  Top 0.406: CON4.1 94.45,12.06 93.18,13.33 80.48,13.33 | 66.51,13.33 54.45,13.33 CON1.1 | 66.51,13.33 80.48,13.33 | 66.51,13.33 CON2.1 | 80.48,13.33 CON3.1 | 41.62,32.38 40.02,32.38 37.09,29.45 30.19,29.45 30.18,29.44
  Top 1.016: 35.39,3.42 35.39,17.17 35.39,18.45
  Top 1.27: 72.58,33.02 72.1,33.02 70.7,34.41 | CON1.1 52.54,12.57 51.14,13.97 47.84,13.97 45.55,11.68 45.55,6.85
  Top 1.93: 74.64,38.22 70.83,34.41 70.7,34.41 70.64,34.41 70.62,34.43 70.6,34.41 L1.2
  Bottom 0.305: 1.61,47.24 1.1,46.86 | 1.61,47.24 1.61,49.78 | 1.61,47.24 1.1,44.95 1.23,44.83 1.1,44.7 1.61,44.7 1.61,42.16 | 1.61,42.16 1.1,41.78 | 1.61,42.16 1.61,39.47 arc-45 1.54,39.29 1.1,38.86 1.1,15.24 LED5.A
  Bottom 1.93: CON4.1 94.45,13.46 92.93,14.98 72.99,14.98 69.81,18.16 69.81,24.38 69.05,25.14 69.05,29.71 66.51,32.25 L1.2 | L1.2 | L1.2 66.52,34.43
VREGSLUG5  (1 unrouted)
  Top 1.27: 90.16,49.78 91.02,49.78 92.04,48.38
  Top 1.778: 92.04,48.38 92.02,48.38 | 92.02,48.38 L2.2 | 92.02,48.38
  Top 1.93: 88.23,44.57 92.04,48.38
  Bottom 0.3: 2.72,10.38 2.73,10.37 3.03,10.67
  Bottom 0.305: 50.25,21.58 CON-SLUG.7
  Bottom 0.4: 2.72,10.38 2.38,10.03 LED6.A | 3.03,10.67 11.41,10.67 13.23,12.49 13.23,21.63 16.02,24.42 19.82,24.42 22.65,21.58 50.25,21.58
  Bottom 1.422: 88.23,44.57 88.23,43.3 86.32,41.4 74.38,41.4 71.59,38.6 65.75,38.6 63.21,36.06 63.21,26.66 61.68,25.14 55.08,25.14 54.19,24.25 54.19,23.11 53.3,22.22 CON-SLUG.7

## Text on the board
Top: studentrobotics.org
Bottom: REV7.3
tNames: SV5V | GND | 3.3V | Mclr | S5V | 1